# EAGLE board akabeacon_mini (EAGLE 7.2.0)
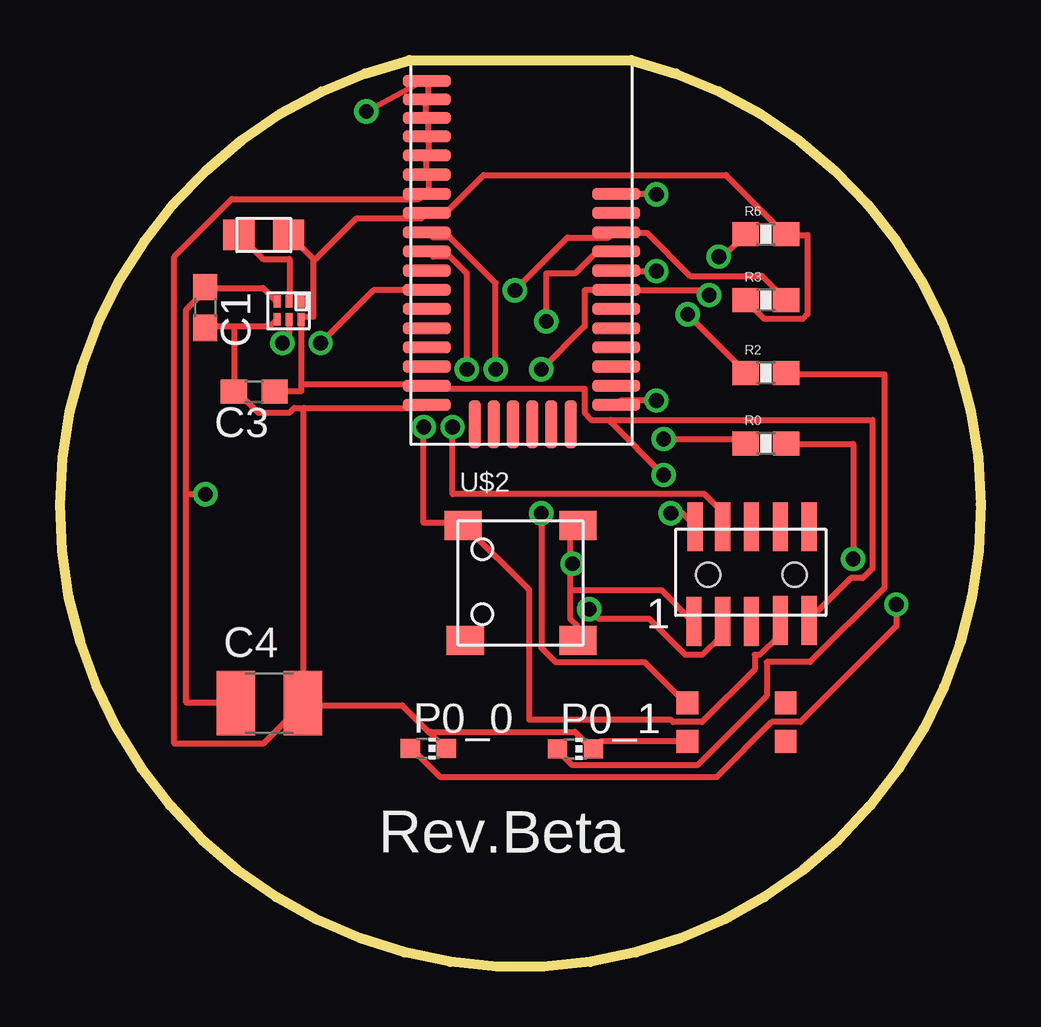
[diagram p0: board, top side]
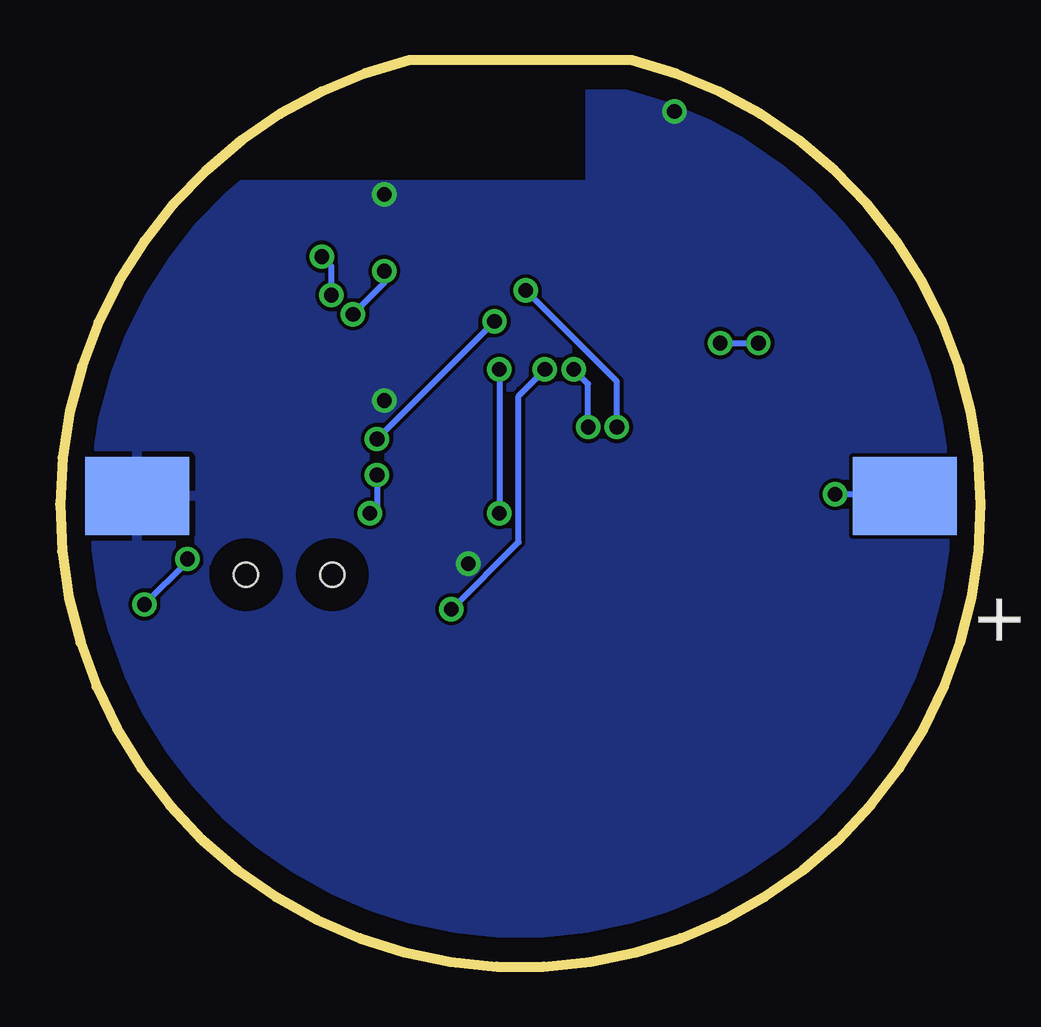
[diagram p1: board, bottom side, seen from below]

Size 38.38 x 37.79 mm. Coordinates in mm from the lower left corner, seen from the top.
Outline: 23.82,37.79 arc-332 14.57,37.79 23.82,37.79
Copper layers (1*16): Top 0.035mm / dielectric 1.5mm / Bottom 0.035mm
Design rules "default *": minimum track width 10mil, minimum drill 24mil, track to track 6mil, track to pad 6mil, pad to pad 6mil, via to via 6mil, smd to smd 6mil, copper to edge 40mil, drill to drill 8mil, minimum pad ring 10mil, minimum via ring 8mil, stop-mask expansion 4mil, vias tented up to drill 0mil, thermal gap 10mil

## Footprints (pad centres in the part's own frame; a part is rotated, then mirrored left to right if it is on the bottom)
C0603 = smd 1.1 x 1: 1 -0.85,0; 2 0.85,0
C3225 = smd 1.6 x 2.7: 1 -1.4,0; 2 1.4,0
INDUCTOR-0805 = smd 1.3 x 1.27: P$1 -1.04,0.02; P$2 1.04,0.01
CHIP-LED0603 = smd 0.8 x 0.8: A 0,-0.75; C 0,0.75
0603-RES = smd 1.1 x 1: 1 -0.85,0; 2 0.85,0
TI-TPS62730 = smd 0.3 x 0.52: 1 0.48,0.25; 2 -0.02,0.25; 3 -0.52,0.25; 4 -0.52,-0.5; 5 -0.02,-0.5; 6 0.48,-0.5
SMTU2450-BOTTOM-MINI = smd 3.251 x 4.318 bottom: P$_GND 0,-16; P$_VCC 0,16
SWITCH-LS6J2M-T = smd 1.55 x 1.2: 1 -2.4,2.4; 2 -2.3,-2.4; 3 2.4,2.4; 4 2.4,-2.4
PIN-HEADER-SMT(1.27MM)2X5 = smd 0.635 x 2.032: 1 -2.8,-1.65; 2 -2.75,2.3; 3 -1.6,-1.65; 4 -1.6,2.3; 5 -0.4,-1.65; 6 -0.4,2.3; 7 0.8,-1.6; 8 0.8,2.3; 9 2,-1.6; 10 2,2.3 | hole 1: 1.4,0.3; -2.2,0.3
BLE113 = smd 2 x 0.5: 1 -5.08,5.08; 2 -5.08,4.31; 3 -5.08,3.54; 4 -5.08,2.77; 5 -5.08,1.97; 6 -5.08,1.17; 7 -5.08,0.37; 8 -5.08,-0.43; 9 -5.08,-1.23; 10 -5.08,-2.03; 11 -5.08,-2.83; 12 -5.08,-3.63; 13 -5.08,-4.43; 14 -5.08,-5.23; 15 -5.08,-6.03; 16 -5.08,-6.83; 17 -5.08,-7.63; 18 -5.08,-8.43; 25 2.82,-8.43; 26 2.82,-7.63; 27 2.82,-6.83; 28 2.82,-6.03; 29 2.82,-5.23; 30 2.82,-4.43; 31 2.82,-3.63; 32 2.82,-2.83; 33 2.82,-2.03; 34 2.82,-1.23; 35 2.82,-0.43; 36 2.82,0.37 | smd 0.5 x 2: 19 -3.08,-9.23; 20 -2.28,-9.23; 21 -1.48,-9.23; 22 -0.68,-9.23; 23 0.12,-9.23; 24 0.92,-9.23
SWITCH-4P(KMR2) = smd 0.9 x 0.95: 1 -1,0; 2 3.1,0; 3 -1,-1.6; 4 3.1,-1.6

## Placement (x,y rotation side)
C1  [C0603]  6.06,27.47 270 top
C3  [C0603]  8.1,23.96 180 top
C4  [C3225]  8.73,10.98 0 top
INDUCTOR1  INDUCTOR-0805  [INDUCTOR-0805]  8.5,30.48 0 top
P0_0  [CHIP-LED0603]  15.36,9.09 270 top
P0_1  [CHIP-LED0603]  21.49,9.07 270 top
R0  180OHM  [0603-RES]  29.43,21.8 0 top
R2  180OHM  [0603-RES]  29.43,24.74 0 top
R3  10K  [0603-RES]  29.43,27.78 0 top
R6  100K  [0603-RES]  29.43,30.52 0 top
TPS1  TI-TPS62730  [TI-TPS62730]  9.57,27.47 0 top
U$1  SMTU2450-BOTTOM-MINI  [SMTU2450-BOTTOM-MINI]  19.17,19.61 90 top
U$2  SWITCH-LS6J2M-T  [SWITCH-LS6J2M-T]  19.2,15.99 0 top
U$3  PIN-HEADER-SMT(1.27MM)2X5  [PIN-HEADER-SMT(1.27MM)2X5]  29.23,16.03 0 top
U$4  BLE113  [BLE113]  20.37,31.84 0 top
U$5  SWICTH-4P(KMR2)  [SWITCH-4P(KMR2)]  27.16,10.99 0 top

## Library data of the parts
C1 C3 C4 = rcl
INDUCTOR1 = gclueParts
P0_0 P0_1 = led
R0 R2 R3 R6 = SparkFun
TPS1 = gclueSupply
U$1 U$2 U$4 = gclue
U$3 U$5 = gclue-test

## Nets
DEBUG_CLOCK: U$3.4 U$4.10
DEBUG_DATA: U$3.3 U$4.9
GND: C1.2 C3.2 C4.2 P0_0.C P0_1.C TPS1.4 U$1.P$_GND U$2.3 U$2.4 U$3.1 U$4.1 U$4.2 U$4.3 U$4.4 U$4.5 U$4.6 U$4.7 U$4.18 U$4.25 U$4.36 U$5.3
N$1: C1.1 C4.1 TPS1.3 U$1.P$_VCC
N$2: P0_0.A R0.2
N$3: P0_1.A R2.2
N$4: U$5.2
N$5: INDUCTOR1.P$1 TPS1.2
P0_0: R0.1 U$4.33
P0_1: R2.1 U$4.32
P0_2: R6.1 U$4.31 U$5.1
P0_3: U$4.30
P0_4: U$4.29
P0_5: U$4.28
P0_6: U$4.27
P0_7: U$4.26
P1_0: U$4.24
P1_1: U$4.23
P1_2: U$4.22
P1_3: U$4.21
P1_4: U$4.20
P1_5: U$4.19
P1_6: U$4.13
P1_7: TPS1.5 U$4.12
P2_0: U$4.11
RESET: R3.2 U$2.1 U$3.7 U$4.34
V+: C3.1 INDUCTOR1.P$2 R3.1 R6.2 TPS1.6 U$3.2 U$3.9 U$4.8 U$4.17

## Tracks (layer width: path | path; a pad name or v marks a point on that pad's centre or on a via)
DEBUG_CLOCK  (via drill 0.61)
  Top 0.254: v16.97,24.89 16.97,28.89 16.27,29.59 15.57,29.59 15.37,29.79 U$4.10 | v16.37,22.49 16.37,19.69 26.87,19.69 27.57,18.99 27.57,18.39 U$3.4
  Bottom 0.254: v16.97,24.89 16.37,24.29 v16.37,22.49
DEBUG_DATA  (via drill 0.61)
  Top 0.254: v18.17,24.89 18.17,28.49 16.27,30.39 15.57,30.39 15.37,30.59 U$4.9 | v22.07,14.89 22.47,14.49 24.57,14.49 26.07,12.99 26.77,12.99 27.57,13.79 27.57,14.29 U$3.3
  Bottom 0.254: v18.17,24.89 19.27,23.79 19.27,17.69 v22.07,14.89
GND  (via drill 0.61)
  Top 0.254: 21.27,16.79 21.27,18.39 U$2.3 | 21.27,16.79 21.27,15.69 | 21.27,15.69 21.27,14.49 21.57,14.19 21.57,13.59 U$2.4 | 21.27,15.69 25.07,15.69 26.37,14.39 U$3.1 | U$4.25 23.37,23.59 v24.87,23.59 | v24.87,32.19 23.27,32.19 U$4.36 | v12.77,35.64 15.27,36.99 U$4.1 15.37,36.89 15.37,36.19 U$4.2 15.27,36.09 15.27,35.49 U$4.3 15.37,35.29 15.37,34.69 U$4.4 15.37,34.59 15.37,33.89 U$4.5 15.27,33.69 15.27,33.09 U$4.6 15.37,32.99 15.37,32.29 U$4.7 15.17,32.19 14.97,31.99 7.17,31.99 4.77,29.59 4.77,9.29 8.47,9.29 10.07,10.89 C4.2 | v21.37,16.79 21.27,16.79 | TPS1.4 8.77,26.69 7.27,26.69 | 7.27,26.69 6.07,26.69 C1.2 | 7.27,26.69 7.27,23.99 C3.2 7.37,23.99 8.27,23.09 9.57,23.09 9.77,23.29 10.17,23.29 | U$4.18 15.17,23.29 10.17,23.29 | U$5.3 22.57,9.39 22.27,9.09 P0_1.C 22.17,9.09 21.47,9.79 15.47,9.79 15.42,9.74 | 15.42,9.74 14.27,10.89 10.17,10.89 C4.2 | 15.42,9.74 16.07,9.09 P0_0.C | 10.17,23.29 10.17,11.09 C4.2
  pour Bottom: 0.07,-0.21 38.17,-0.01 38.67,30.89 38.67,32.59 16.27,32.59 16.27,37.99 0.32,37.99 -0.33,0.89
N$1  (via drill 0.61)
  Top 0.254: TPS1.3 8.97,27.79 8.47,28.29 6.07,28.29 C1.1 6.07,28.19 5.27,27.39 5.27,19.69 | 5.27,19.69 5.27,10.99 7.27,10.99 C4.1 | 5.27,19.69 v6.07,19.69
  Bottom 0.254: v6.07,19.69 3.17,19.69 U$1.P$_VCC
N$2  (via drill 0.61)
  Top 0.254: v34.87,15.09 34.87,14.19 30.87,10.19 29.67,10.19 27.37,7.89 15.87,7.89 14.67,9.09 P0_0.A | v33.07,16.99 33.07,21.79 30.37,21.79 R0.2
  Bottom 0.254: v34.87,15.09 33.07,16.89 v33.07,16.99
N$3
  Top 0.254: P0_1.A 20.77,8.99 21.37,8.39 26.57,8.39 29.47,11.29 29.47,12.69 31.27,12.69 34.37,15.79 34.37,24.69 30.37,24.69 R2.2
N$5
  Top 0.254: INDUCTOR1.P$1 8.47,29.49 9.57,29.49 9.57,27.79 TPS1.2
P0_0  (via drill 0.61)
  Top 0.254: v25.17,21.99 28.47,21.99 28.57,21.89 R0.1 | v20.27,26.89 20.27,28.89 21.47,28.89 22.37,29.79 23.17,29.79 U$4.33
  Bottom 0.254: v20.27,26.89 v25.17,21.99
P0_1  (via drill 0.61)
  Top 0.254: v26.17,27.19 28.57,24.79 R2.1 | v24.87,28.99 23.27,28.99 U$4.32
  Bottom 0.254: v26.17,27.19 24.87,28.49 v24.87,28.99
P0_2  (via drill 0.61)
  Top 0.254: v20.07,18.89 20.07,13.29 20.67,12.69 24.37,12.69 26.07,10.99 U$5.1 | v20.07,24.89 21.87,26.69 21.87,28.19 23.17,28.19 U$4.31 23.27,28.19 26.87,28.19 v27.07,27.99 | v27.47,29.59 27.67,29.59 28.57,30.49 R6.1
  Bottom 0.254: v20.07,24.89 v20.07,18.89 | v27.47,29.59 27.07,29.19 v27.07,27.99
P1_7  (via drill 0.61)
  Top 0.254: v9.27,25.99 9.57,25.99 9.57,26.89 TPS1.5 | v10.87,25.99 13.07,28.19 15.27,28.19 U$4.12
  Bottom 0.254: v10.87,25.99 v9.27,25.99
RESET  (via drill 0.61)
  Top 0.254: R3.2 29.27,28.79 26.27,28.79 24.47,30.59 23.27,30.59 U$4.34 23.07,30.59 22.87,30.39 21.17,30.39 v18.97,28.19 | U$3.7 29.97,14.39 29.97,13.79 29.17,12.99 28.97,12.99 28.97,12.39 26.77,10.19 25.57,10.19 25.47,10.29 19.57,10.29 19.57,15.69 16.87,18.39 U$2.1 16.77,18.49 15.17,18.49 v15.17,22.49
  Bottom 0.254: v18.97,28.19 15.17,24.39 v15.17,22.49
V+  (via drill 0.61)
  Top 0.254: R3.1 29.37,26.99 30.97,26.99 31.17,27.19 31.17,30.49 30.37,30.49 R6.2 30.17,30.59 27.77,32.99 17.67,32.99 16.17,31.49 15.37,31.49 U$4.8 15.07,31.19 12.37,31.19 10.67,29.49 10.57,29.49 | 10.07,24.29 10.07,23.99 8.97,23.99 C3.1 | 10.07,24.29 10.07,26.89 TPS1.6 10.07,27.09 10.57,27.09 10.57,29.49 | 10.57,29.49 9.57,30.49 INDUCTOR1.P$2 | 10.07,24.29 15.27,24.29 U$4.17 15.27,24.09 21.87,24.09 21.87,23.09 22.17,22.79 22.97,22.79 | 22.97,22.79 33.87,22.79 33.87,16.59 33.47,16.19 32.97,16.19 31.27,14.49 U$3.9 | v25.47,18.89 25.97,18.89 26.47,18.39 U$3.2 | v25.17,20.49 22.97,22.69 22.97,22.79
  Bottom 0.254: v25.47,18.89 25.17,19.19 v25.17,20.49

## Text on the board
tPlace: Rev.Beta